# Altium PCB PCB_Version_1.PcbDoc
Units mm, origin at the board's own origin, x right, y up, seen from the top; angles counter-clockwise.
Board outline 89.92 x 99.82 mm, 2 copper layers (Top Layer, Bottom Layer); 44 components, 34 nets, 150 pads, 6 vias.
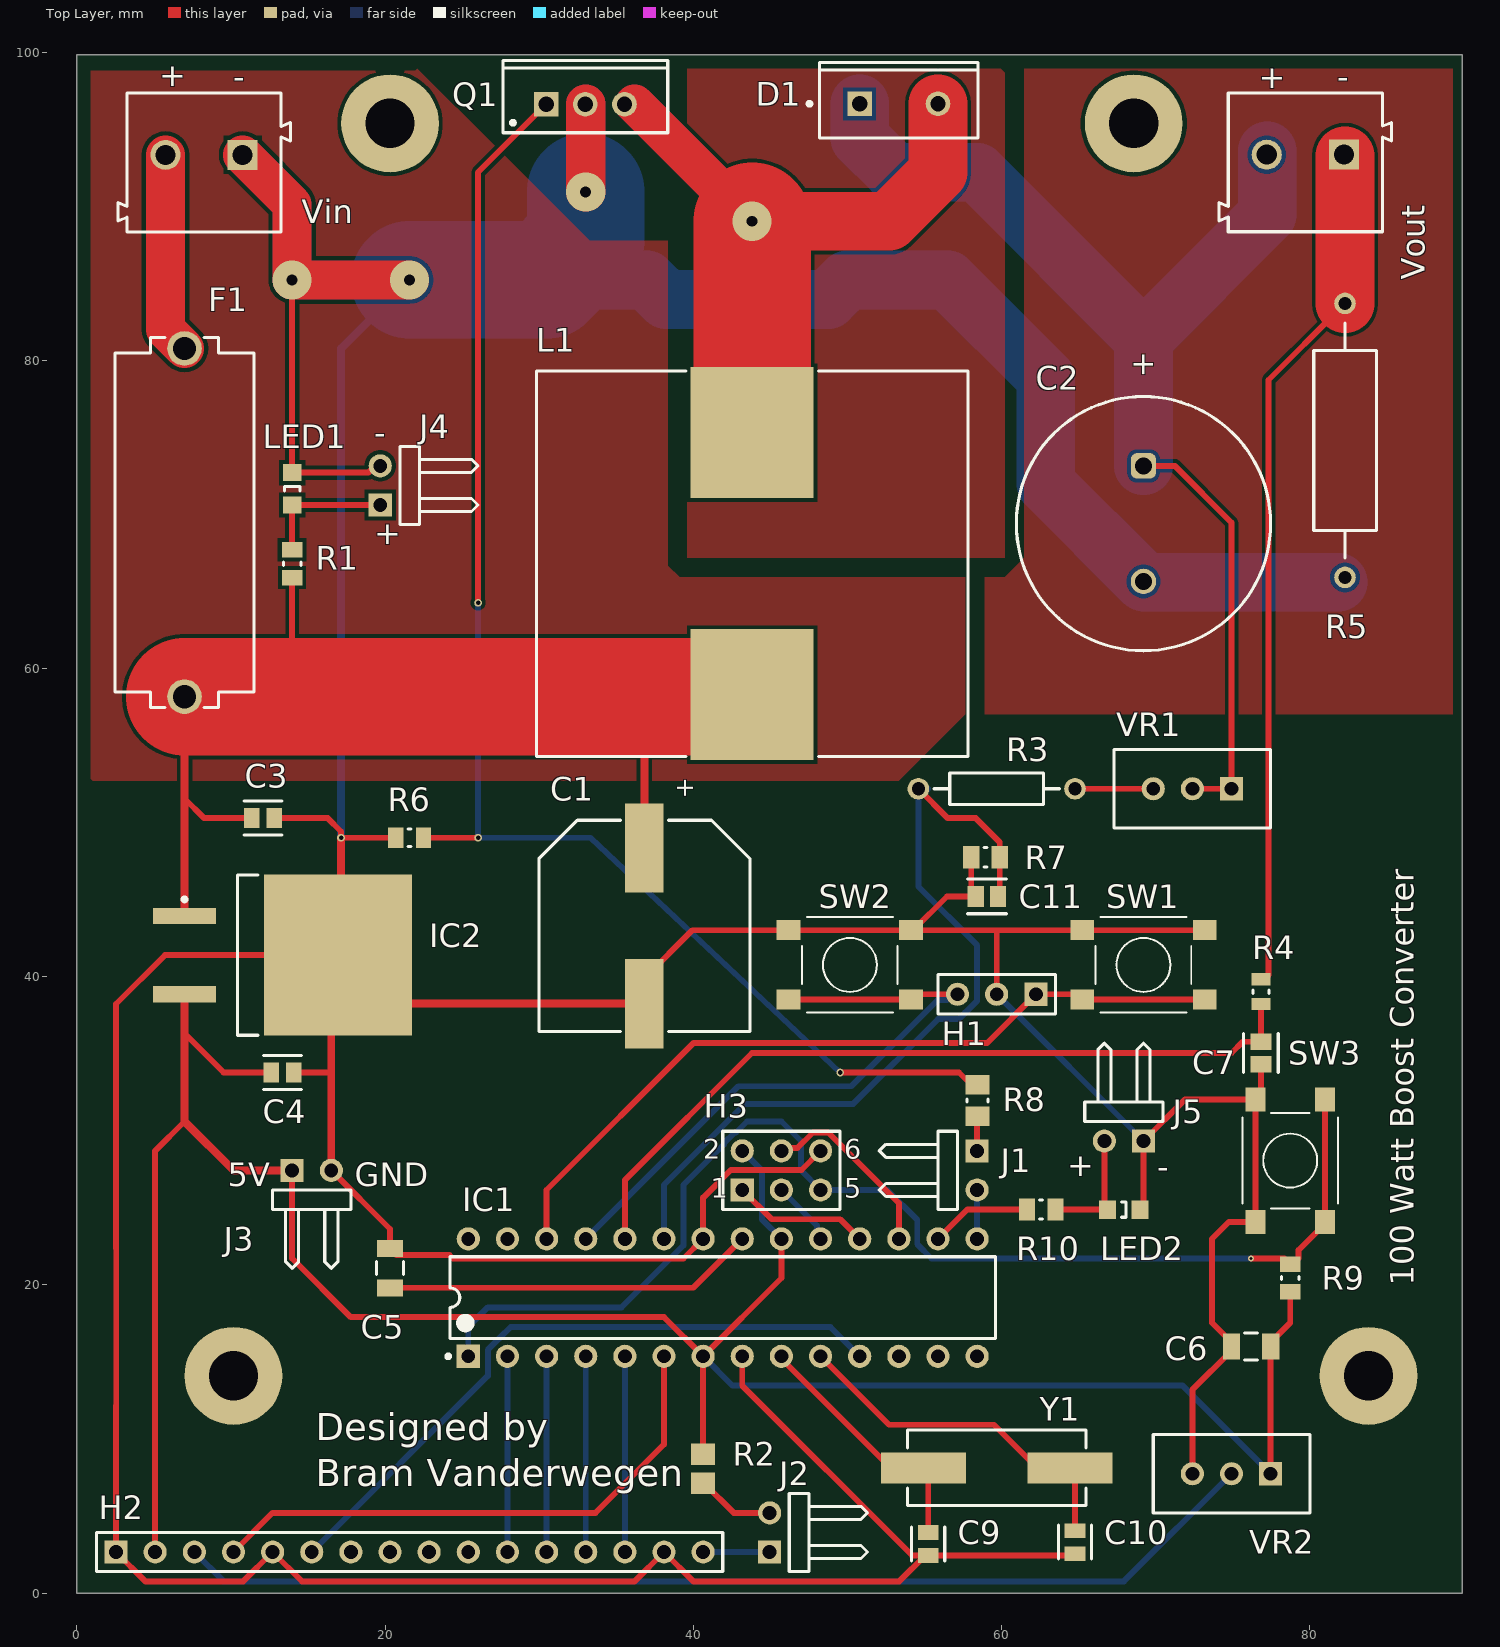
[diagram p0: Top Layer view]
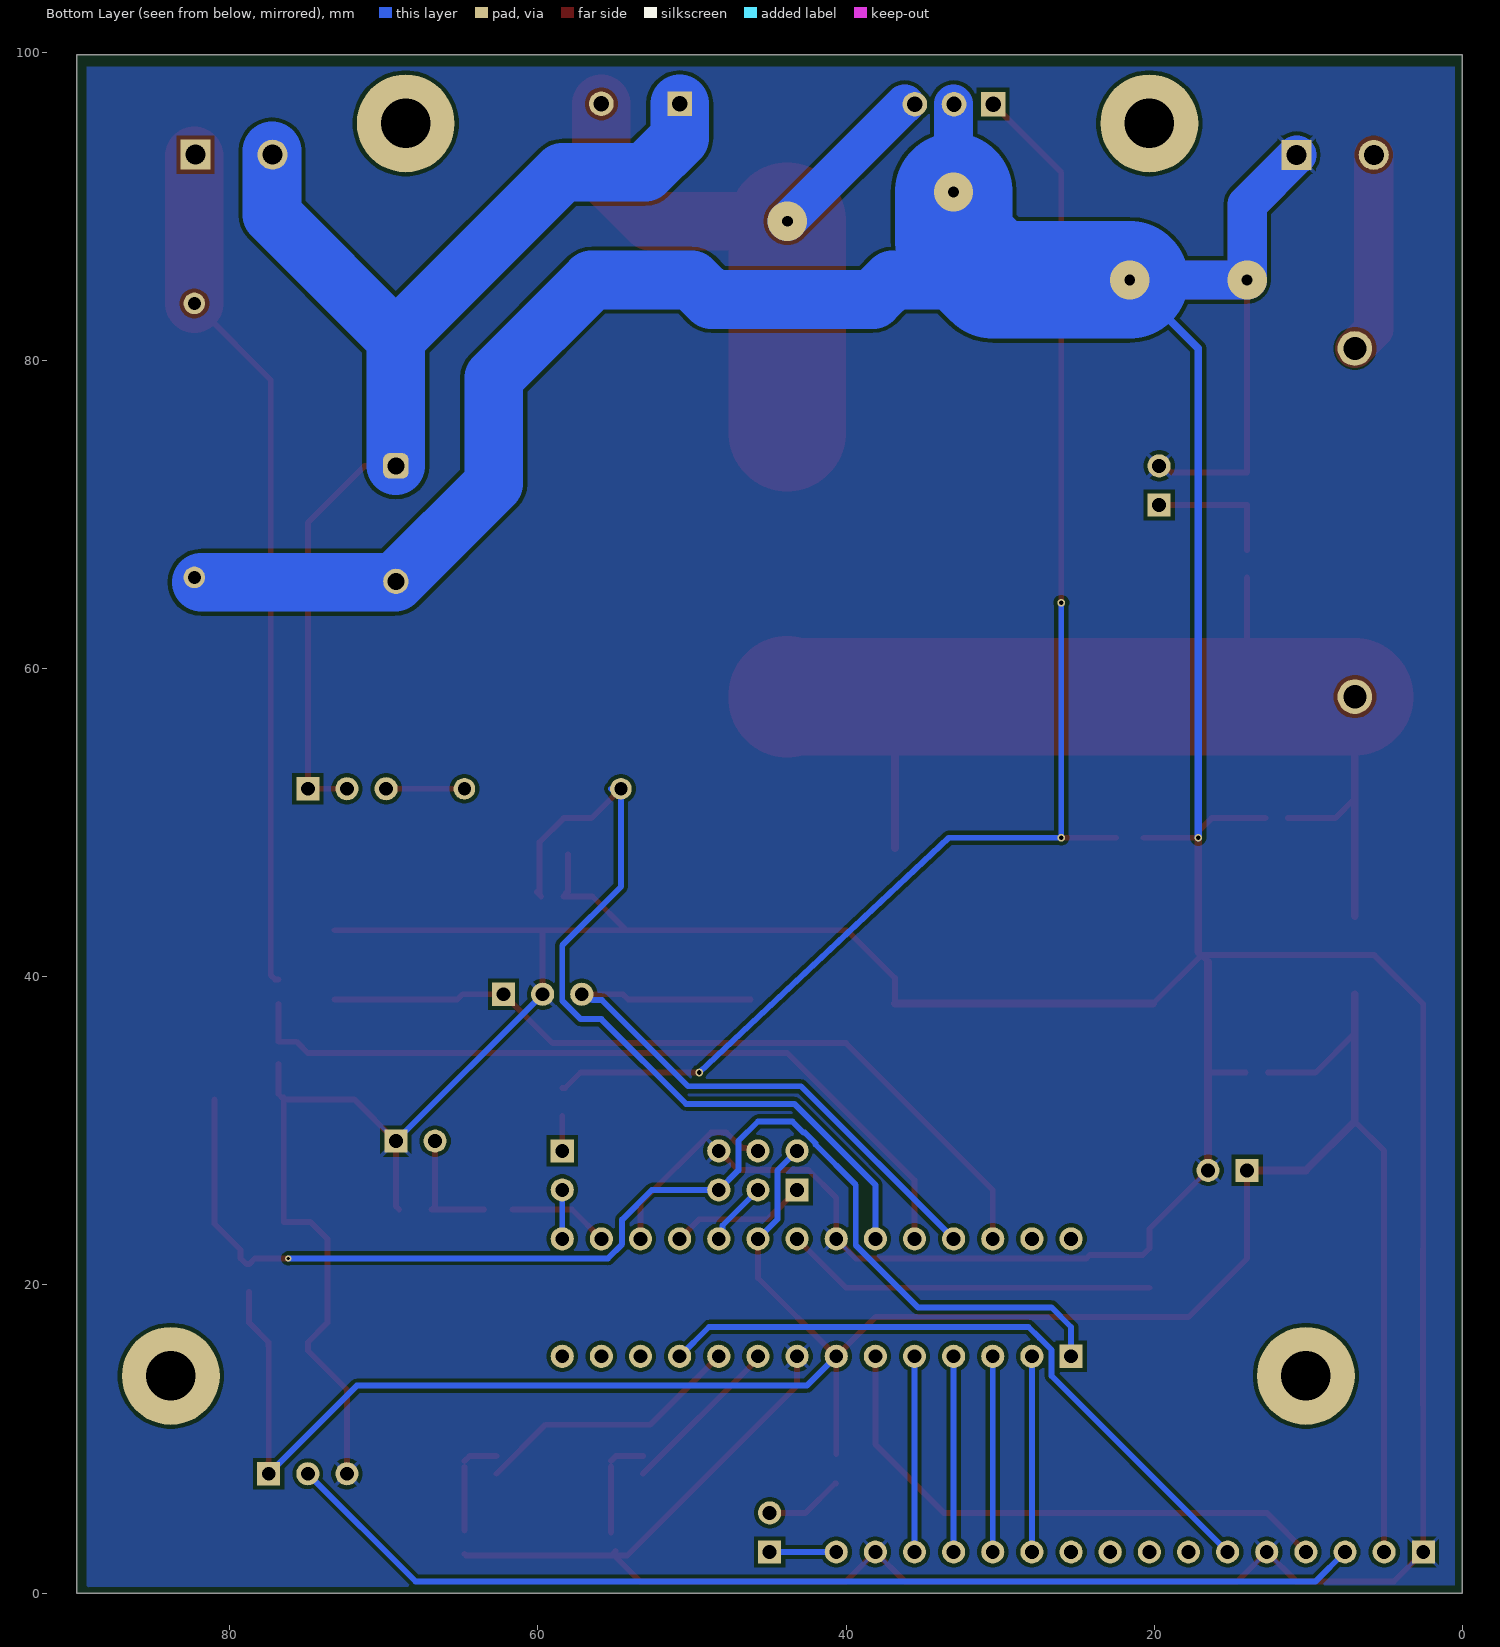
[diagram p1: Bottom Layer view, seen from below]
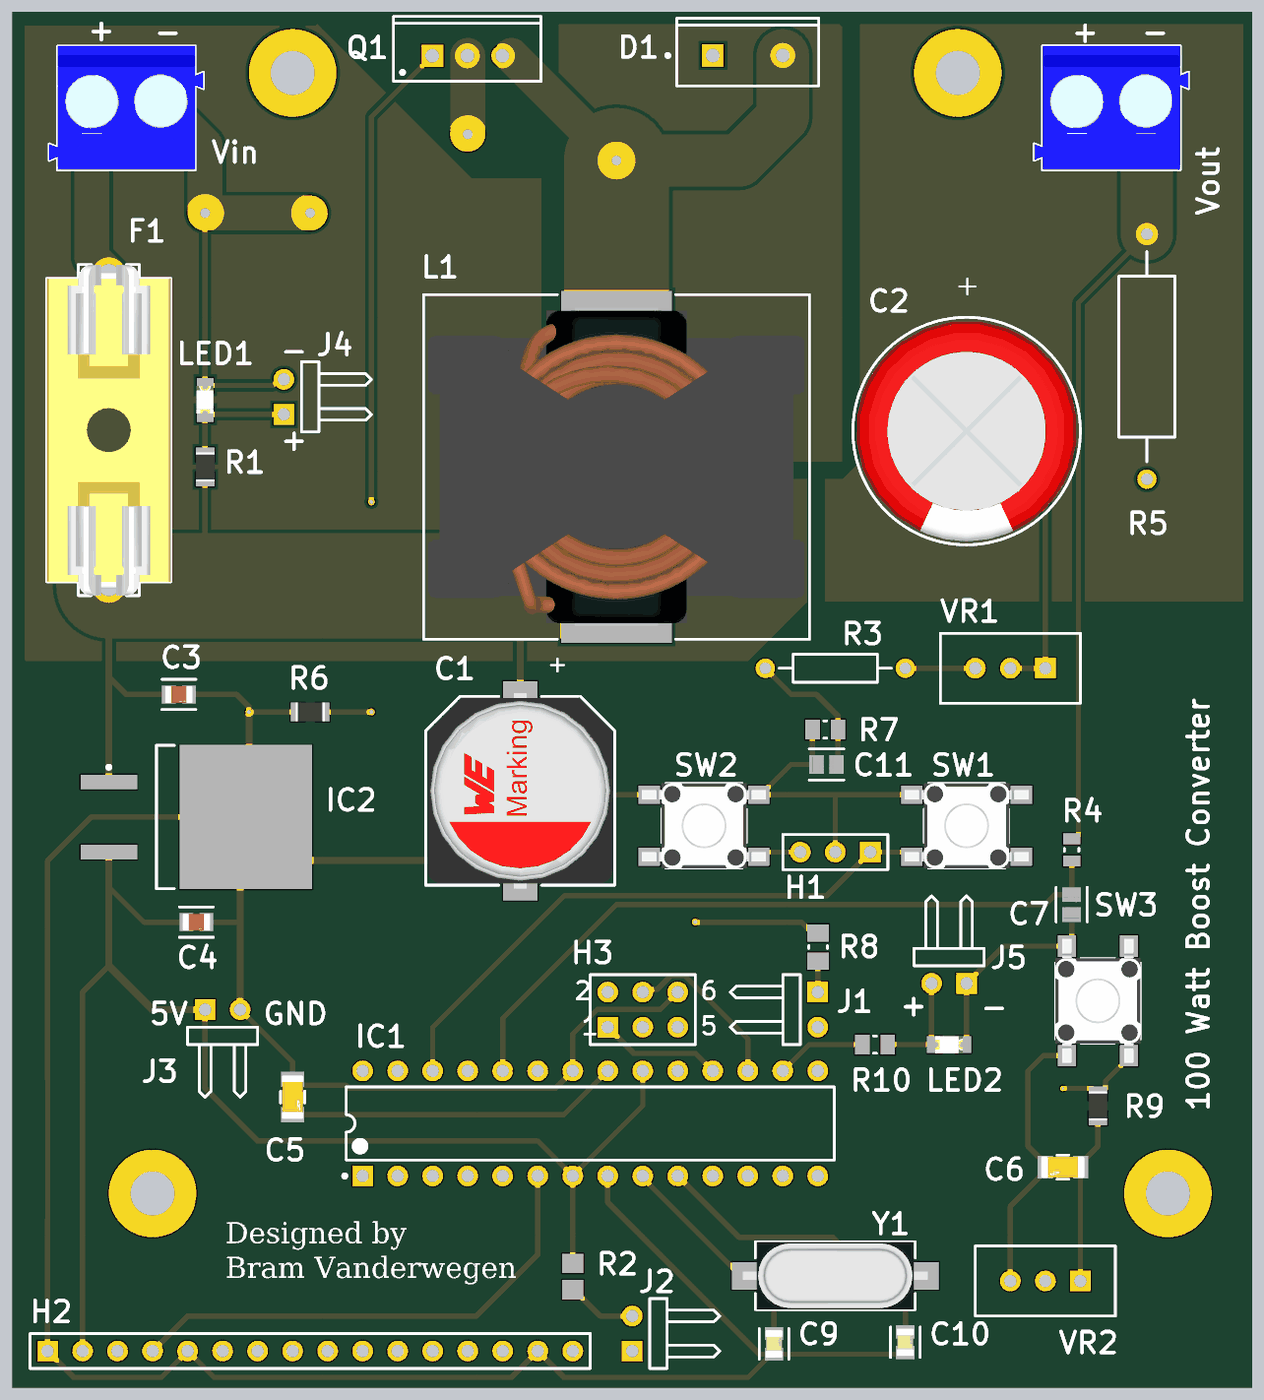
[diagram p2: 3D render of the assembled board from above, using the file's embedded part models]

## Layer stack, top to bottom
Top Solder: solder mask 0.0102, Solder Resist, Dk 3.5
Top Layer: signal copper 0.0356
Dielectric 1: dielectric 0.32, FR-4, Dk 4.8
Bottom Layer: signal copper 0.0356
Bottom Solder: solder mask 0.0102, Solder Resist, Dk 3.5

## Board outline
0,99.822 89.916,99.822 89.916,0 0,0

## Design rules (kind name [scope] priority, off if disabled: settings)
Clearance [All] p1: gap=0.254 ignorepadtopadclearanceinfootprint=FALSE except(0: Arc-Hole Track-Hole SMDPad-Hole THPad-Hole Via-Hole Fill-Hole Poly-Hole Region-Hole Text-Hole)
Height [All] p1: minheight=0 maxheight=254 prefheight=12.7
HoleSize [All] p1: absolutevalues=TRUE maxlimit=5 minlimit=0.025 maxpercent=80.000 minpercent=20.000
PolygonConnect [All] p1: connectstyle=Relief reliefconductorwidth=0.254 reliefentries=4 polygonreliefangle="45 Angle" airgapwidth=0.254
RoomDefinition Boost_Converter_1 [InComponentClass('Boost_Converter_1')] p1: confinementstyle=ConfineIn formatcopy=TRUE lockcomponents=FALSE outline 152.817,5.626 463.84,5.626 463.84,49.314 152.817,49.314
RoutingVias [All] p1: holewidth=0.711 width=1.27 viastyle="Through Hole" minholewidth=0.2 minwidth=0.4 maxholewidth=5 maxwidth=10
ShortCircuit [All] p1: allowed=TRUE
SolderMaskExpansion [All] p1: expansion=0.102 istentingtop=FALSE
Width Width_2 [Not All] p1: maxlimit=7.62 minlimit=0.381 preferedwidth=0.381 minimp=50.000000 maximp=50.000000 favimp=50.000000
Width Width_1 [Not All] p2: maxlimit=0.254 minlimit=0.254 preferedwidth=0.254
Width [All] p3: maxlimit=7.62 minlimit=0.381 preferedwidth=0.381 minimp=50.000000 maximp=50.000000 favimp=50.000000
27 further rules are at their usual default settings.

## Components (designator, comment, footprint, x,y, rotation, side; value= is the part's Value field where it differs from the comment)
C1 "1000uF, 25V" WCAP-ASLI_D12.5H14 36.83,43.307 r90 top
C2 "1000uF, 63V" WCAP-ATG5_D16H31.5 69.215,69.402 r90 top
C3 "100nF 50V" FP-GCD21B-0_15-IPC_C 12.065,50.292 r0 top
C4 "100nF 50V" FP-GCD21B-0_15-IPC_C 13.335,33.782 r0 top
C5 "100nF 50V" FP-CL31-IPC_C 20.32,21.088 r270 top
C6 "100nF 50V" FP-CL31-IPC_C 76.2,16.002 r180 top
C7 "10nF 50V" FP-CL21-IPC_C 76.835,35.052 r270 top
C9 "22pF" FP-C0805C-DN-MFG 55.245,3.187 r270 top value="22 pF"
C10 "22pF" FP-C0805C-DN-MFG 64.77,3.302 r270 top value="22 pF"
C11 "10nF 50V" FP-CL21-IPC_C 59.055,45.212 r180 top
D1 "MBR10100G" ONSC-TO-220-2-221B-04_E 53.34,96.647 r90 top
F1 "696101000002" 696101000002 6.985,69.472 r270 top
H1 "Header 3" HDR1X3 62.23,38.862 r180 top
H2 "Header 16" HDR1X16 2.54,2.667 r0 top
H3 "Header 3X2" HDR2X3 43.18,26.162 r0 top
IC1 "ATmega8-16PU" 28P3 41.91,19.177 r90 top
IC2 "L7805CD2T-TR" TO-263_M 13.335,41.402 r0 top
J1 "Jumper" HDR1X2H 58.42,28.702 r270 top
J2 "Jumper" HDR1X2H 44.958,2.667 r90 top
J3 "Jumper" HDR1X2H 13.97,27.432 r0 top
J4 "Jumper" HDR1X2H 19.685,70.612 r90 top
J5 "Jumper" HDR1X2H 69.215,29.337 r180 top
L1 "100uH, 11.2A" WE-HCF_2920 43.815,66.802 r0 top
LED1 "Green" 0805_A 13.97,71.662 r270 top
LED2 "Super Red" 0805_A 67.945,24.892 r180 top
Q1 "IRL540NPbF" TO-220AB 32.995,96.622 r0 top
R1 "10kΩ" RESC2013X60X35NL10T20 13.97,66.802 r270 top
R2 "4.7kOhm" RESC2013X60X40ML20T25 40.64,8.067 r90 top
R3 "43K Ohm" AXIAL-0.4 59.69,52.197 r180 top value=43K
R4 "1.5k" RESC2013X60X35LL10T20 76.835,39.027 r270 top
R5 "0.22Ω 5W" AXIAL-0.7 82.296,74.803 r90 top value=0.22Ω
R6 "10k" RESC2013X60X35NL10T20 21.59,49.022 r0 top
R7 "2.7k" RESC2013X50X30NL20T20 58.964,47.752 r0 top
R8 "RK73B2ATTD100J" RESC2013X60X30ML20T20 58.445,31.97 r270 top
R9 "10 kOhm" RESC2013X60X35NL10T20 78.74,20.447 r270 top
R10 "2.7k" RESC2013X50X30NL20T20 62.575,24.892 r180 top
SW1 "430182070816" 430182070816 69.215,40.767 r0 top
SW2 "430182070816" 430182070816 50.165,40.767 r0 top
SW3 "430182070816" 430182070816 78.74,28.067 r270 top
Vin "691101710002" 691101710002 8.255,92.837 r180 top
Vout "691101710002" 691101710002 79.716,92.845 r180 top
VR1 "10kΩ" 10k_trimmer 72.39,52.197 r180 top
VR2 "10kΩ" 10k_trimmer 74.93,7.747 r180 top
Y1 "16MHz" WE-XTAL_HC49/4HSMX 59.69,8.128 r0 top

## Footprints (in the part's own frame and the unit in brackets; to place one, negate y for a bottom-side part, rotate by r counter-clockwise, add the part's x,y. Pads: shape width x height; smd on the part's side, far side on the other; paste and mask are expansions set on the pad)
10k_trimmer [mm]
  rect 1.5x1.5 hole 0.9: 1(-2.54,0)
  round 1.5 hole 0.9: 2(0,0) 3(2.54,0)
  silkscreen extent -5.08,-2.54 5.08,2.54
28P3 [mm] "28-Pin Plastic Dual In-Line Package (PDIP)"
  rect 1.5x1.5 hole 0.9: 1(-3.81,16.51)
  round 1.5 hole 0.9: 2(-3.81,13.97) 3(-3.81,11.43) 4(-3.81,8.89) 5(-3.81,6.35) 6(-3.81,3.81) 7(-3.81,1.27) 8(-3.81,-1.27) 9(-3.81,-3.81) 10(-3.81,-6.35) 11(-3.81,-8.89) 12(-3.81,-11.43) 13(-3.81,-13.97) 14(-3.81,-16.51) 15(3.81,-16.51) 16(3.81,-13.97) 17(3.81,-11.43) 18(3.81,-8.89) 19(3.81,-6.35) 20(3.81,-3.81) 21(3.81,-1.27) 22(3.81,1.27) 23(3.81,3.81) 24(3.81,6.35) 25(3.81,8.89) 26(3.81,11.43) 27(3.81,13.97) 28(3.81,16.51)
  silkscreen extent -3.93,-17.7 2.65,17.93, body extent -3.6,-17.65 3.6,17.65, height 4.58
0805_A [mm] "Chip LED, 2-Leads, Body 2.0x1.3mm, IPC Medium Density"
  rect 1.1x1.2 smd: 1(-1.05,0) 2(1.05,0)
  silkscreen extent -0.15,-0.5 0.15,0.5, body extent -1,-0.62 1,0.63, height 0.68
430182070816 [mm] "6*6mm vertical type, SMD, height 7.0mm, black actuator, 160gf, T&R"
  rect 1.55x1.3 smd: 1(-3.975,2.25) 2(-3.975,-2.25) 3(3.975,2.25) 4(3.975,-2.25)
  silkscreen extent -3.1,-3.1 3.1,3.1, body extent -4.5,-3.1 4.5,3.1, height 6.99
691101710002 [mm] "5,00mm - modular - blue - Horizontal entry with pressure clamp - 12,6mm height - 02p"
  rect 1.95x1.95 hole 1.3: 1(-2.5,-0.5)
  round 1.95 hole 1.3: 2(2.5,-0.5)
  silkscreen extent -5.6,-4.5 5.6,4.5, body extent -5.6,-4.5 5.6,4.5, height 12.65
696101000002 [mm] "FUSEHOLDER BLOCKS - PCB - CLIP COVER - THT"
  round 2.25 hole 1.5: 1(-11.3,0) 2(11.3,0)
  silkscreen extent -12,-4.5 12,4.5, body extent -12,-4.5 12,4.5, height 13.55
AXIAL-0.4 [mm] "Axial Device, Thru-Hole; 2 Leads; 0.4 in Pin Spacing"
  round 1.4 hole 0.85: 1(-5.08,0) 2(5.08,0)
  silkscreen extent -4.06,-1.02 4.06,1.02
AXIAL-0.7 [mm] "Axial Device, Thru-Hole; 2 Leads; 0.7 in Pin Spacing"
  round 1.4 hole 0.85: 1(-8.89,0) 2(8.89,0)
  silkscreen extent -7.62,-2.03 7.62,2.03
FP-C0805C-DN-MFG [mm]
  rect 0.95x1.35 smd paste+0 mask+0: 1(-0.75,0) 2(0.75,0)
  silkscreen extent -1.1,-1.07 1.1,1.07, body extent -1.4,-0.85 1.4,0.85, height 0.25
FP-CL21-IPC_C [mm]
  rect 1.055x1.356 smd paste+0 mask+0: 1(-0.726,0) 2(0.726,0)
  silkscreen extent -1.25,-1.13 1.25,1.13, body extent -1.35,-0.82 1.35,0.82, height 0.25
FP-CL31-IPC_C [mm]
  rect 1.105x1.658 smd paste+0 mask+0: 1(-1.276,0) 2(1.276,0)
  silkscreen extent -0.42,-0.87 0.42,0.87, body extent -1.93,-0.97 1.93,0.97, height 0.25
FP-GCD21B-0_15-IPC_C [mm]
  rect 1.006x1.308 smd paste+0 mask+0: 1(-0.726,0) 2(0.726,0)
  silkscreen extent -1.23,-1.1 1.23,1.1, body extent -1.33,-0.8 1.33,0.8, height 0.25
HDR1X2H [mm] "Connector; Header; 2 Position; Right Angle"
  rect 1.5x1.5 hole 0.9: 1(0,0)
  round 1.5 hole 0.9: 2(2.54,0)
  silkscreen extent -1.27,-6.35 3.81,-1.27
HDR1X3 [mm] "Connector; Header; 3 Position"
  rect 1.5x1.5 hole 0.9: 1(0,0)
  round 1.5 hole 0.9: 2(2.54,0) 3(5.08,0)
  silkscreen extent -1.27,-1.27 6.35,1.27
HDR1X16 [mm] "Connector; Header; 16 Position"
  rect 1.5x1.5 hole 0.9: 1(0,0)
  round 1.5 hole 0.9: 2(2.54,0) 3(5.08,0) 4(7.62,0) 5(10.16,0) 6(12.7,0) 7(15.24,0) 8(17.78,0) 9(20.32,0) 10(22.86,0) 11(25.4,0) 12(27.94,0) 13(30.48,0) 14(33.02,0) 15(35.56,0) 16(38.1,0)
  silkscreen extent -1.27,-1.27 39.37,1.27
HDR2X3 [mm] "Connector; Header; 3x2 Position"
  rect 1.5x1.5 hole 0.9: 1(0,0)
  round 1.5 hole 0.9: 2(0,2.54) 3(2.54,0) 4(2.54,2.54) 5(5.08,0) 6(5.08,2.54)
  silkscreen extent -1.27,-1.27 6.35,3.81
ONSC-TO-220-2-221B-04_E [mm] "FM, 2-Leads, Body 10.3x4.85mm, Pitch 5.08mm"
  rect 1.6x1.6 hole 1: 1(0,2.54)
  round 1.6 hole 1: 3(0,-2.54)
  silkscreen extent -2.2,-5.15 2.69,5.92, body extent -2.18,-5.15 2.67,5.15, height 19.05
RESC2013X50X30NL20T20 [mm] "Chip Resistor, 2-Leads, Body 2.00x1.25mm, IPC Medium Density"
  rect 1.05x1.45 smd: 1(-0.925,0) 2(0.925,0)
  silkscreen extent -0.1,-0.62 0.1,0.62, body extent -1.1,-0.72 1.1,0.72, height 0.5
RESC2013X60X30ML20T20 [mm] "Chip Resistor, 2-Leads, Body 2.00x1.25mm, IPC Low Density"
  rect 1.25x1.55 smd: 1(-1.025,0) 2(1.025,0)
  silkscreen extent -0.1,-0.67 0.1,0.67, body extent -1.1,-0.72 1.1,0.72, height 0.6
RESC2013X60X35LL10T20 [mm] "Chip Resistor, 2-Leads, Body 2.00x1.25mm, IPC High Density"
  rect 0.8x1.25 smd: 1(-0.8,0) 2(0.8,0)
  silkscreen extent -0.1,-0.53 0.1,0.53, body extent -1.05,-0.67 1.05,0.67, height 0.6
RESC2013X60X35NL10T20 [mm] "Chip Resistor, 2-Leads, Body 2.1x1.35mm, IPC Medium Density"
  rect 1x1.35 smd: 1(-0.9,0) 2(0.9,0)
  silkscreen extent -0.1,-0.58 0.1,0.58, body extent -1.05,-0.68 1.05,0.67, height 0.6
RESC2013X60X40ML20T25 [mm] "Chip Resistor, 2-Leads, Body 2.00x1.25mm, IPC Low Density"
  rect 1.4x1.55 smd: 1(-0.95,0) 2(0.95,0)
  body extent -1.1,-0.72 1.1,0.72, height 0.6
TO-220AB [mm] "TO, Thru-Hole, Vertical, Heatsink Mounted; 3 In-Line Leads; Pitch 2.54 mm"
  rect 1.6x1.6 hole 1: 1(-2.54,0)
  round 1.6 hole 1: 2(0,0) 3(2.54,0)
  silkscreen extent -5.35,-1.85 5.35,2.85, body extent -5.4,-1.9 5.4,2.9, height 19.3
TO-263_M [mm] "D2-PAK, 4-Leads, Body 9.2x10.2mm, Pitch 2.54mm, Lead Span 15.4mm, IPC Low Density"
  rect 4.1x1.05 smd: 1(-6.35,2.54) 3(-6.35,-2.54)
  rect 9.6x10.45 smd: 4(3.6,0)
  silkscreen extent -6.47,-5.2 -1.6,5.2, body extent -2.9,-5.2 6.45,5.2, height 4.6
WCAP-ASLI_D12.5H14 [mm] "Aluminium Electrolytic V-Chip SMT Capacitors, 12.5x14mm"
  rect 5.8x2.5 smd: 1(5.05,0) 2(-5.05,0)
  silkscreen extent -6.85,-6.85 6.85,6.85, body extent -7.1,-6.72 7.1,6.73, height 14
WCAP-ATG5_D16H31.5 [mm] "Aluminum Electrolytic Capacitors, 16x31.5mm"
  rrect50% 1.65x1.65 hole 1.1: 1(3.75,0)
  round 1.65 hole 1.1: 2(-3.75,0)
  silkscreen extent -8.25,-8.25 8.25,8.25, body extent -7.99,-8 8,8, height 31.81
WE-HCF_2920 [mm] "SMD High Current Inductor, body 28x25mm"
  rect 8x8.5 smd: 1(0,8.5) 2(0,-8.5)
  silkscreen extent -14,-12.5 14,12.5, body extent -13.65,-11.55 13.65,11.55, height 20
WE-XTAL_HC49/4HSMX [mm] "Quartz Crystal, size HC49/4HSMX, body 11.4x4.9mm"
  rect 5.5x2 smd: 1(-4.75,0) 2(4.75,0)
  silkscreen extent -5.8,-2.45 5.8,2.45, body extent -6.7,-2.45 6.7,2.45, height 4.3

## Part data
C1: library part 865080462016, "WCAP-ASLI Aluminum Electrolytic Capacitor, V-Chip, SMT, D12.5xH14mm, 1000uF, 25V", Capacitance=1000uF, Capacitance Tolerance=+/-20%, Leakage Current=250uA, Manufacturer="Wurth Elektronik", Operating Temperature="-55 to +105degC", Rated Voltage=25VDC, Ripple Current=1100mA, Supplier Part Number 1=732-8444-1-ND, ComponentLink1Description=Manufacturer, ComponentLink1URL=http://www.we-online.de, ComponentLink2Description=Datasheet, ComponentLink2URL=https://www.we-online.com/catalog/datasheet/865080462016.pdf, Diameter=12.5mm, Dissipation Factor=14%, Endurance=2000h, Height=14mm, Manufacturer Part Number=865080462016, Mounting Technology=SMT, Packaging="Tape and Reel", Published Date="October 2020", Supplier 1=Digi-Key, Technical Reference=ASEH140102M025DVCTGB000
C2: library part 860020780025, "CAP ALUM 1000UF 20% 63V RADIAL", Capacitance=1000uF, Capacitance Tolerance=+/-20%, Case/Package=Radial, Leakage Current=630uA, Manufacturer="Wurth Elektronik", Max Operating Temperature=105°C, Min Operating Temperature=-40°C, Operating Temperature="-40 to +105degC", Package Quantity=250, Rated Voltage=63VDC, Ripple Current=1185mA, Supplier Part Number 1=732-8986-1-ND, Tolerance=20%, Voltage Rating=63V, Category="Aluminum Electrolytic Capacitors", ComponentLink1Description=Manufacturer, ComponentLink1URL=http://www.we-online.de, ComponentLink2Description=Datasheet, ComponentLink2URL=https://www.we-online.com/catalog/datasheet/860020780025.pdf, ComponentLink3Description=http://www.farnell.com/datasheets/1879699.pdf?src-supplier=Farnell, ComponentLink3URL=http://www.farnell.com/datasheets/1879699.pdf?src-supplier=Farnell, ComponentLink4Description=https://katalog.we-online.de/pbs/datasheet/860020780025.pdf?src-supplier=Digi-Key, ComponentLink4URL=https://katalog.we-online.de/pbs/datasheet/860020780025.pdf?src-supplier=Digi-Key, ComponentLink5Description=http://www.farnell.com/datasheets/1879699.pdf?src-supplier=Element14, ComponentLink5URL=http://www.farnell.com/datasheets/1879699.pdf?src-supplier=Element14, ComponentLink6Description=http://katalog.we-online.de/pbs/datasheet/860020780025.pdf?src-supplier=Digi-Key, ComponentLink6URL=http://katalog.we-online.de/pbs/datasheet/860020780025.pdf?src-supplier=Digi-Key, Diameter=16mm, Dissipation Factor=9%, Endurance=2000h, Height=31.5mm, Height - Seated (Max)=1.299inch, Lead Pitch=0.295inch, Life (Hours)=2000Hour, Manufacturer Part Number=860020780025, Mount="Through Hole", Mounting Technology=THT, Packaging="Ammo Pack", Polarity=Polar, Pricing 1="1=2,37000, 50=2,01700, 100=1,75700 (USD)", Published Date="October 2020", REACH SVHC=Unknown, RoHS=Yes, RoHS Compliant=Yes, Stock 1=70, Supplier 1=Digi-Key, Technical Reference=ATDK315102M063DSPADB000, Voltage Rating (DC)=63V
C3 C4: library part CMP-06035-045527-1, "Chip Multilayer Ceramic Capacitors for Automotive, 0805, 0.10uF, X7R, 15%, 10%, 50V, Grade 1", Capacitance=100nF, Case Code (Imperial)=0805, Case Code (Metric)=2012, Dielectric=X7R, Max Operating Temperature=125°C, Min Operating Temperature=-55°C, Package Quantity=3000, Ratings=AEC-Q200, Tolerance=10%, Voltage Rating=50V, Case/Package=0805, Depth=1.25mm, Height=1.25mm, Length=2mm, Mount="Surface Mount", Packaging="Tape and Reel", Termination=SMD/SMT, Thickness=0.049inch, Voltage Rating (DC)=50V, Weight=0.000335oz, Width=0.049inch
C5 C6: library part CMP-13271-001731-1, "Cap Ceramic 100nF 50V X7R ±10% SMD 1206 +125°C Embossed T/R", Capacitance=100nF, Case/Package=1206, Dielectric=X7R, Max Operating Temperature=125°C, Min Operating Temperature=-55°C, Package Quantity=15000, Tolerance=10%, Voltage=50V, Depth=1.6mm, Height=0.85mm, Lead Free="Lead Free", Length=3.2mm, Mount="Surface Mount", Packaging="Tape and Reel", Radiation Hardening=No, Thickness=0.037inch, Voltage Rating=50V, Voltage Rating (DC)=50V, Width=0.063inch
C7 C11: library part CMP-13271-002413-1, "CL21 Series 0805 10nF 50V ±10% Tolerance X7R Multilayer Ceramic Chip Capacitor", Capacitance=10nF, Case Code (Imperial)=0805, Case Code (Metric)=2012, Dielectric=X7R, Max Operating Temperature=125°C, Min Operating Temperature=-55°C, Package Quantity=1, Tolerance=10%, Voltage Rating=50V, Case/Package=0805, Contact Plating=Tin, Depth=1.25mm, Height=0.65mm, Lead Free="Lead Free", Length=0.079inch, Mount="Surface Mount", Packaging="Tape and Reel", Radiation Hardening=No, Thickness=0.03inch, Width=0.049inch
C9 C10: library part CMP-03020-018552-1, "CAP CER 22PF 50V C0G/NP0 0805", Capacitance="22 pF", Manufacturer=KEMET, Manufacturer Part Number=C0805C220J5GAC7210, Package=C0805C-DN, Temperature="-55°C to +125°C", Temperature Characteristic=C0G, Temperature Coefficient=30ppm/°C, Temperature Range High=+125°C, Temperature Range Low=-55°C, Tolerance=0.05, Voltage Rating="50 V", Automotive=No, Category=Cap, ComponentLink2Description=Datasheet, ComponentLink2URL=https://content.kemet.com/datasheets/KEM_C1003_C0G_SMD.pdf, Device Class L1="Passive Components", Device Class L2=Capacitors, Device Class L3="Ceramic Capacitors", Digikey Description="CAP CER 22PF 50V C0G/NP0 0805", Height=0.88mm, Ipc Land Pattern Name=CAPC200125X78, Lead Free=Yes, Material=Ceramic, Octopart=https://octopart.com/c0805c220j5gac7210-kemet-3882539, RoHS=TRUE
D1: library part CMP-1055-00601-1, "SWITCHMODE(TM) Power Rectifier, 2-Pin TO-220, Pb-Free, Tube", Manufacturer="On Semiconductor", ComponentLink1Description="Manufacturer URL", ComponentLink1URL=http://www.onsemi.com/, ComponentLink2Description=Datasheet, ComponentLink2URL=http://www.onsemi.cn/pub_link/Collateral/MBR1080-D.PDF, ComponentLink3Description="Package Specification", ComponentLink3URL=http://www.onsemi.com/pub_link/Collateral/BYW29-D.PDF, Configuration=Single, DatasheetVersion="Rev. 1", IFSM Max (A)=150, Mounting Technology="Through Hole", PackageDescription="2-Pin Flange Mount, Vertical Straight Lead, Body 9.97 x 4.44 mm, Pitch 5.08 mm", PackageReference=TO-220-2-221B-04_E, PackageVersion="Rev. E", Packing=Tube, PartNumber=MBR10100G, RoHS=TRUE
F1: "WR-FSH Fuse Holder Blocks Fuse Holder Blocks Clip Cover for PCB", Operating Temperature="-30 to 120 degC", ComponentLink1Description=Manufacturer, ComponentLink1URL=http://www.we-online.de, ComponentLink2Description=Datasheet, ComponentLink2URL=https://katalog.we-online.de/em/datasheet/696101000002.pdf, Fuse Size="5x20 mm", Mounting Technology=THT, Packaging=Box, Part Number=696101000002, Published Date="August 2018", Publisher="Wurth Elektronik"
H1: "Header, 3-Pin", LatestRevisionDate=17-Jul-2002, LatestRevisionNote="Re-released for DXP Platform.", Publisher="Altium Limited"
H2: "Header, 16-Pin", LatestRevisionDate=17-Jul-2002, LatestRevisionNote="Re-released for DXP Platform.", Publisher="Altium Limited"
H3: "Header, 3-Pin, Dual row", LatestRevisionDate=17-Jul-2002, LatestRevisionNote="Re-released for DXP Platform.", Publisher="Altium Limited"
IC1: library part CMP-0095-00372-1, "8-bit AVR Microcontroller, 4.5-5.5V, 16MHz, 8KB Flash, 512 Bytes EEPROM, 1KB SRAM, 28-pin PDIP, Industrial Grade (-40°C to 85°C)", ComponentLink1Description="Manufacturer URL", ComponentLink1URL=http://www.atmel.com/, ComponentLink2Description=ATmega8(L), ComponentLink2URL=http://www.atmel.com/dyn/resources/prod_documents/doc2486.pdf, ComponentLink3Description="ATmega8(L) Summary", ComponentLink3URL=http://www.atmel.com/dyn/resources/prod_documents/2486S.pdf, DatasheetVersion="revZ, Feb-2011", PackageDescription="28-lead (0.300\"/7.62mm Wide) Plastic Dual Inline Package (PDIP)", PackageReference=28P3, PackageVersion="revB, Sep-2001"
IC2: library part CMP-0244-00213-1, "Positive Voltage Regulator, 3-Pin D2PAK, Tape and Reel", ComponentLink1Description="Manufacturer URL", ComponentLink1URL=http://www.st.com, ComponentLink2Description=Datasheet, ComponentLink2URL=http://www.st.com/internet/com/TECHNICAL_RESOURCES/TECHNICAL_LITERATURE/DATASHEET/CD00000444.pdf, DatasheetVersion=16/11/2011, PackageDescription="3-Pin Transistor Outline Package 2.54 mm Pitch, 15.4 mm Lead Span (D2PAK)", PackageReference=TO-263, PackageVersion=2011
J1 J2 J3 J4 J5: library part "Header 2H", "Header, 2-Pin, Right Angle", LatestRevisionDate=17-Jul-2002, LatestRevisionNote="Re-released for DXP Platform.", Publisher="Altium Limited"
L1: library part 74437529203101, "WE-HCF SMT High Current Inductor, size 2920, 100uH, 11.2A, 25.19mOhm", DC Resistance max.=25.19mOhm, DC Resistance typ.=22.9mOhm, Inductance=100uH, Manufacturer="Wurth Elektronik", Operating Temperature="-40 to +125degC", Rated Current=11.2A, Saturation Current=9.4A, Self Resonant Frequency=4.3MHz, Supplier Part Number 1=732-11715-ND, ComponentLink1Description=Manufacturer, ComponentLink1URL=http://www.we-online.de, ComponentLink2Description=Datasheet, ComponentLink2URL=https://www.we-online.com/catalog/datasheet/74437529203101.pdf, Manufacturer Part Number=74437529203101, Mounting Technology=SMT, Packaging="Tray and Carton", Published Date="September 2020", Size=2920, Supplier 1=Digi-Key
LED1: library part CMP-1426-00007-1, "SMD mono-color Chip LED, WL-SMCW, Green", Manufacturer="Wuerth Elektronik", PartNumber=150080GS75000, Color=Green, ComponentLink1Description="Manufacturer URL", ComponentLink1URL=http://www.we-online.com, ComponentLink2Description=Datasheet, ComponentLink2URL=http://katalog.we-online.com/led/datasheet/150080GS75000.pdf, PackageReference=0805_A
LED2: library part CMP-1426-00010-1, "SMD mono-color Chip LED, WL-SMCW, Super Red", Manufacturer="Wuerth Elektronik", PartNumber=150080SS75000, Color="Super Red", ComponentLink1Description="Manufacturer URL", ComponentLink1URL=http://www.we-online.com, ComponentLink2Description=Datasheet, ComponentLink2URL=http://katalog.we-online.com/led/datasheet/150080SS75000.pdf, PackageReference=0805_A
Q1: library part NMOS-2, "Trans MOSFET N-CH 100V 36A 3-Pin(3+Tab) TO-220AB", Case/Package=TO-220AB, Continuous Drain Current (ID)=36A, Drain to Source Breakdown Voltage=100V, Drain to Source Resistance=63mR, Drain-source On Resistance-Max=53mR, Gate to Source Voltage (Vgs)=16V, Input Capacitance=1.8nF, Manufacturer="International Rectifier", Manufacturer Part Number=IRL540NPBF, Max Operating Temperature=175°C, Max Power Dissipation=140W, Min Operating Temperature=-55°C, Package Quantity=50, Supplier Part Number 1=IRL540NPBF-ND, Category=MOSFETs, ComponentLink1Description="Manufacturer Link", ComponentLink1URL=http://www.irf.com/, ComponentLink2Description=https://datasheet.ciiva.com/7835/irl540npbf-7835764.pdf?src-supplier=Element14, ComponentLink2URL=https://datasheet.ciiva.com/7835/irl540npbf-7835764.pdf?src-supplier=Element14, ComponentLink3Description=https://datasheet.ciiva.com/14170/kkirl540n-data-e-14170372.pdf?src-supplier=Distrelec, ComponentLink3URL=https://datasheet.ciiva.com/14170/kkirl540n-data-e-14170372.pdf?src-supplier=Distrelec, ComponentLink4Description=https://datasheet.ciiva.com/29326/162798-da-01-en-irf-540n-29326742.pdf?src-supplier=Conrad, ComponentLink4URL=https://datasheet.ciiva.com/29326/162798-da-01-en-irf-540n-29326742.pdf?src-supplier=Conrad, ComponentLink5Description=https://datasheet.ciiva.com/6368/irl540npbf-6368261.pdf?src-supplier=Digi-Key, ComponentLink5URL=https://datasheet.ciiva.com/6368/irl540npbf-6368261.pdf?src-supplier=Digi-Key, ComponentLink6Description=https://datasheet.ciiva.com/16395/irl540npbf-16395612.pdf?src-supplier=Future+Electronics, ComponentLink6URL=https://datasheet.ciiva.com/16395/irl540npbf-16395612.pdf?src-supplier=Future+Electronics, Current Rating=36A, DatasheetVersion=PD-9.814, Drain to Source Voltage (Vdss)=100V, Dual Supply Voltage=100V, Element Configuration=Single, Fall Time=62ns, Height=8.77mm, LatestRevisionDate=17-Jul-2002, LatestRevisionNote="Re-released for DXP Platform.", Lead Free="Lead Free", Lead Pitch=2.54mm, Length=10.54mm, Mount="Through Hole", Nominal Vgs=2V, Note="Pin 2 is electrically connected to pin 4.", Number of Elements=1, Number of Pins=3, On-State Resistance=53mR, PackageDescription="TO, Thru-Hole, Vertical, Heatsink Mounted; 3 In-Line Leads; Pitch 2.54 mm", PackageReference=TO-220AB, PackageVersion=Feb-1997, Packaging=Rail/Tube, Power Dissipation=140W, Pricing 1="1=1,24000, 10=1,01100, 25=0,99200, 100=0,78610, 500=0,66628, 1000=0,54276, 2500=0,51094, 5000=0,49342 (USD)", Published=8-Jun-2000, Publisher="Altium Limited", Rds On Max=44mR, REACH SVHC="No SVHC", Recovery Time=290ns, Rise Time=81ns, RoHS=Yes, RoHS Compliant=Yes, Series=HEXFET®, Stock 1=6708, Supplier 1=Digi-Key, Termination="Through Hole", Turn-Off Delay Time=39ns, Turn-On Delay Time=11ns, Voltage Rating (DC)=100V, Width=4.69mm
R1 R6 R9: library part CMP-1659-00013-4, "Chip Resistor, 10 KOhm, +/- 1%, 0.125 W, -55 to 155 degC, 0805 (2012 Metric), RoHS, Tape and Reel", Manufacturer=Yageo, Max Operating Temperature="155 degC", Min Operating Temperature="-55 degC", Package Quantity=5000, Voltage Rating="150 V", ComponentLink1Description="Manufacturer URL", ComponentLink1URL=http://www.yageo.com/, ComponentLink2Description=Datasheet, ComponentLink2URL=http://www.yageo.com/documents/recent/PYu-RC_Group_51_RoHS_L_04.pdf, DatasheetVersion="Rev. 4, 02/2016", Height="0.5 mm", Length="2 mm", Mount="Surface Mount", Mounting Technology="Surface Mount", PackageDescription="2-Pin Surface Mounted Device, Body 2 x 1.25 mm", PackageReference=0805, Packaging="Tape and Reel", Pins=2, REACH SVHC="No SVHC", RoHSCompliant=true
R2: library part CMP-2001-00644-1, Manufacturer=Panasonic, Part Number=ERA6AEB472V
R3: library part Res2, "Res Metal Film 43K Ohm 1% 0.6W ±50ppm/C Conformal Coated AXL Ammo", Case/Package=Conformal, Manufacturer=Yageo, Manufacturer Part Number=MF0207FTE52-43K, Max Operating Temperature=155°C, Min Operating Temperature=-55°C, Resistance=43kR, Resistor Type="Metal Film", Supplier Part Number 1=MF0207FTE52-43K-ND, Temperature Coefficient=50ppm/°C, Tolerance=1%, Category="Through-Hole Resistors", ComponentLink1Description=http://components.arrow.com/part/dataview/0323_02063068?src-supplier=Arrow+Europe, ComponentLink1URL=http://components.arrow.com/part/dataview/0323_02063068?src-supplier=Arrow+Europe, ComponentLink2Description=https://www.distrelec.biz/Web/Downloads/_t/ds/MFxx_eng_tds.pdf?mime=application%2Fpdf&src-supplier=Distrelec, ComponentLink2URL=https://www.distrelec.biz/Web/Downloads/_t/ds/MFxx_eng_tds.pdf?mime=application%2Fpdf&src-supplier=Distrelec, ComponentLink3Description=http://www.yageo.com/documents/recent/Leaded-R_MF0_2011.pdf?src-supplier=Avnet+Europe, ComponentLink3URL=http://www.yageo.com/documents/recent/Leaded-R_MF0_2011.pdf?src-supplier=Avnet+Europe, ComponentLink4Description=http://www.yageo.com/documents/recent/Yageo%20LR_MF0_2013.pdf?src-supplier=Avnet, ComponentLink4URL=http://www.yageo.com/documents/recent/Yageo%20LR_MF0_2013.pdf?src-supplier=Avnet, Construction=Cylindrical, Contact Plating=Tin,Matte, Diameter=2.3mm, LatestRevisionDate=17-Jul-2002, LatestRevisionNote="Re-released for DXP Platform.", Length=6.3mm, Military Standard=Not, Mount="Through Hole", PackageDescription="Axial Device, Thru-Hole; 2 Leads; 0.4 in Pin Spacing", PackageReference=AXIAL-0.4, Packaging="Ammo Pack", Pricing 1="5000=0,01445 (USD)", Published=8-Jun-2000, Publisher="Altium Limited", Radiation Hardening=No, RoHS=Yes, RoHS Compliant=Yes, Supplier 1=Digi-Key, Termination=Axial
R4: library part CMP-2001-04524-1, Manufacturer=Yageo, Part Number=RC0805JR-131K5L
R5: library part Res2, "Resistor", Supplier Part Number 1=CA5100R2200JR05, LatestRevisionDate=17-Jul-2002, LatestRevisionNote="Re-released for DXP Platform.", PackageDescription="Axial Device, Thru-Hole; 2 Leads; 0.4 in Pin Spacing", PackageReference=AXIAL-0.4, Published=8-Jun-2000, Publisher="Altium Limited", Supplier 1="Arrow Electronics"
R7 R10: library part CMP-2001-03776-1, Manufacturer="Vishay Dale", Part Number=CRCW08052K70JNEA
R8: library part CMP-2001-04579-1, Manufacturer="KOA Speer", Part Number=RK73B2ATTD100J
SW1 SW2 SW3: library part CMP-1452-00015-1, "WS-TASV SMD Tact Switch 6X6 mm", Manufacturer="Wuerth Elektronik", ComponentLink1Description="Manufacturer URL", ComponentLink1URL=http://www.we-online.com, ComponentLink2Description=Datasheet, ComponentLink2URL=http://katalog.we-online.de/em/datasheet/4301x2.pdf, NoPins=04, PackageReference=430182070816, PartNumber=430182070816
Vin Vout: library part CMP-1502-03256-1, "Series 101 - 5.00 mm Horizontal Entry Modular with Pressure Clamp WR-TBL, 2 pin", Manufacturer="Wurth Elektronik", Operating Temperature=-40to105degC, Datasheet URL=http://katalog.we-online.de/em/datasheet/6911017100xx.pdf, Manufacturer URL=http://www.we-online.de, Mounting Technology=THT, Package Reference=691101710002, Packaging=Box, Part Number=691101710002, Pin Number=2, Pitch=5.00mm, Publisher=WurthElektronik
VR1 VR2: library part CMP-2000-05078-1, "Square Trimming Potentiometer, 10 KOhm, 500 mW, -55 to 125 degC, 3-Pin THD, RoHS, Tube", Manufacturer=Bourns, Manufacturer Part Number=3299W-1-103LF, Operating Temperature Range=-55Cto+125C, Package Description="3-Pin Surface Mount Device, Body 9.53 x 6.1 mm, Pitch 2.54 mm", Package Reference=3299W, Power Rating=500mW(1/2W), Resistance=10kOhms, Temperature Coefficient=100PPM/C, Tolerance=10%, Voltage Rating=300V, Adjustment=TopCrossed, Brand=Bourns, Datasheet URL=https://datasheet.ciiva.com/19482/769696-19482212.pdf, Datasheet Version=Sep-04, Element Type=Cermet, Length=10.03mm, Manufacturer URL=http://www.bourns.com/, Mounting=PanelMount, Packaging=Tube, Product=Multiturn, Product Category=TrimmerResistors-ThroughHole, Product Type=SquareTrimmingPotentiometer, Qualification=Commercial, RoHS=True, Series=3299, Taper=Linear, Termination Style=Pin, Tradename=Trimpot, Type=Trimmers, Unit Weight=0.035000oz, Width=9.53mm
Y1: library part 830051235, "WE-XTAL Quartz Crystal, SMT, HC49/4HSMX, 16MHz, +/-30ppm", Frequency Stability=+/-50ppm, Frequency Tolerance=+/-30ppm, Load Capacitance=18pF, Manufacturer="Wurth Elektronik", Operating Temperature="-40 to +85degC", ComponentLink1Description=Manufacturer, ComponentLink1URL=http://www.we-online.de, ComponentLink2Description=Datasheet, ComponentLink2URL=https://katalog.we-online.com/pbs/datasheet/830051235.pdf, Frequency=16MHz, Manufacturer Part Number=830051235, Mounting Technology=SMT, Packaging="Tape and Reel", Published Date="July 2020", Size=HC49/4HSMX

## Free pads (board coordinates)
  round 0.5 hole 0.3: 11(26.035,49.022) 13(49.53,33.782) q(26.035,64.262)
  round 6.35 hole 3.2: 14(20.32,95.377) 15(83.82,14.097) 16(10.16,14.097) 17(68.58,95.377)

## Via types
v1: diameter 2.54, hole 0.711, Top Layer to Bottom Layer, 4 vias
v2: diameter 0.508, hole 0.3, Top Layer to Bottom Layer, 1 vias
v3: diameter 0.4, hole 0.2, Top Layer to Bottom Layer, 1 vias

## Nets (pads, with @x,y where several pads share a name; then routed paths per layer and width w, separated by ;. In a path a pad name is that pad's centre, name@x,y a point inside that pad or via, vN(x,y) a via of type N, cw(c..) or ccw(c..) an arc to the next point about the centre after c; other vN are vias at no path point)
GND: C1.2 C2.2 C3.2 C4.2 C5.1 C6.2 C7.2 C9.2 C10.2 C11.2 H1.2 H2.1 H2.5 H2.15 H3.6 IC1.8 IC1.22 IC2.4 J3.2 J4.2 J5.1 LED1.1 LED2.1 Q1.2 R5.1 R6.1 R7.1 SW1.1 SW1.3 SW2.1 SW2.3 SW3.2 SW3.4 Vin.1 VR2.3 | length 521.5
  Top Layer w0.381: C3.2 16.278,50.292 17.145,49.425 v2(17.145,49.022) R6.1 ; v1(13.97,85.217) LED1.1 18.908,72.712 19.348,73.152 J4.2 ; C4.2 16.51,33.782 ; J3.2 20.32,23.622 C5.1 20.746,21.939 24.184,21.939 24.406,21.717 39.37,21.717 IC1.22 40.64,25.661 42.438,27.459 47.017,27.459 H3.6 ; IC2.4@16.51,40.977 IC2.4 ; IC2.4@17.145,41.612 IC2.4 ; IC2.4@20.08,38.257 IC2.4 ; C1.2 36.83,39.907 39.94,43.017 SW2.1 SW2.3 SW2.3@54.265,43.017 ; IC1.8 43.18,13.461 54.204,2.437 C9.2@55.045,2.437 ; C9.2@54.96,2.721 C9.2 ; R7.1@58.039,47.952 R7.1 58.039,45.502 C11.2@58.177,45.364 ; C11.2@58.221,45.408 C11.2@58.177,45.364 ; H1.2 59.69,42.955 59.752,43.017 ; C10.2 64.655,2.437 C9.2 ; LED2.1 69.215,25.112 J5.1 71.92,32.042 SW3.2 ; VR2.3 72.39,13.192 74.924,15.726 C6.2 74.924,16.278 73.66,17.542 73.66,22.987 74.765,24.092 SW3.4 SW3.2 ; SW1.3 SW1.1 59.752,43.017 ; SW3.2@76.49,32.167 SW3.2 ; C7.2 76.835,32.387 SW3.2 ; IC2.4 5.715,41.402 2.54,38.227 2.54,22.376 2.552,22.364 2.552,12.198 2.54,12.186 H2.1 4.445,0.762 10.795,0.762 H2.5 14.605,0.762 36.195,0.762 H2.15 40.005,0.762 53.37,0.762 C9.2@55.045,2.437 ; SW2.3@54.265,43.017 59.752,43.017 ; SW2.3@54.265,43.017 56.46,45.212 C11.2 C11.2@58.299,45.242 ; C9.2@55.045,2.437 C9.2 ; C11.2@58.177,45.364 58.055,45.242 C11.2@58.299,45.242 ; C11.2@58.177,45.364 C11.2@58.299,45.242
  Top Layer w0.508: J3.2 16.51,33.782 IC2.4@16.51,40.977 ; IC2.4@17.145,41.612 v2(17.145,49.022) ; IC2.4@20.08,38.257 C1.2
  Top Layer w2.54: Vin.1 13.97,90.122 v1(13.97,85.217) v1(21.59,85.217) ; v1(33.02,90.932) Q1.2@33.02,96.647
  Bottom Layer w0.381: H1.2 J5.1 ; C2.2 C2.2@69.275,65.592 ; R5.1@82.236,65.973 R5.1
  Bottom Layer w0.508: v2(17.145,49.022) 17.145,80.772 v1(21.59,85.217)
  Bottom Layer w2.54: Vin.1 13.97,90.122 v1(13.97,85.217) v1(21.59,85.217) ; v1(33.02,90.932) Q1.2@33.02,96.647
  Bottom Layer w3.81: 30.48,85.217 36.989,85.217 38.259,83.947 48.736,83.947 50.006,85.217 56.515,85.217 62.865,78.867 62.865,72.002 C2.2 ; C2.2@69.275,65.592 R5.1@81.855,65.592
  Bottom Layer w7.62: v1(21.59,85.217) 30.48,85.217 33.02,87.757 v1(33.02,90.932)
NetC1_1: C1.1 C3.1 F1.2 IC2.1 L1.2 R1.2 | length 74.1
  Top Layer w0.381: 6.985,51.562 8.255,50.292 C3.1 ; F1.2 F1.2@6.985,58.457 ; 13.97,58.172 R1.2 ; L1.2@43.685,58.172 L1.2
  Top Layer w0.508: IC2.1 6.985,51.562 F1.2 ; C1.1 36.83,58.172
  Top Layer w7.62: F1.2 13.97,58.172 36.83,58.172 L1.2@43.685,58.172 ; L1.2@43.815,58.052 L1.2
NetC2_1: C2.1 D1.1 Vout.2 VR1.1 VR1.2 | length 76.8
  Top Layer w0.381: C2.1 71.245,73.152 74.93,69.467 VR1.1 VR1.2
  Bottom Layer w3.81: D1.1 50.8,94.434 53.032,92.202 58.42,92.202 69.215,81.407 ; C2.1 69.215,81.407 ; Vout.2@77.256,93.591 77.256,89.448 69.215,81.407
NetC4_1: C4.1 C6.1 H2.2 H3.2 IC1.7 IC1.20 IC2.3 J3.1 R2.2 R9.2 VR2.1 | length 162.1
  Top Layer w0.381: H2.2 5.08,28.702 6.985,30.607 ; 6.985,36.322 9.525,33.782 C4.1 ; J3.1 13.97,21.717 17.78,17.907 38.1,17.907 IC1.7 ; R2.2 IC1.7 ; IC1.20 45.72,20.447 IC1.7 ; VR2.1 77.47,15.996 C6.1 77.476,16.278 78.74,17.542 R9.2 ; 77.47,8.509 77.476,8.515
  Top Layer w0.508: IC2.3 6.985,36.322 6.985,30.607 10.16,27.432 J3.1
  Bottom Layer w0.381: IC1.7 42.545,13.462 71.755,13.462 VR2.1 ; H3.2 44.45,27.432 44.45,24.257 IC1.20
NetC5_2: C5.2 IC1.21 | length 24.2
  Top Layer w0.381: C5.2 40.005,19.812 IC1.21
NetC7_1: C7.1 IC1.24 R4.2 | length 51.3
  Top Layer w0.381: IC1.24 35.56,26.797 43.815,35.052 74.93,35.052 75.656,35.778 C7.1 R4.2
NetC9_1: C9.1 IC1.9 Y1.1 | length 17.2
  Top Layer w0.381: IC1.9 45.72,15.217 Y1.1@53.19,7.747 ; Y1.1@53.19,8.89 54.94,8.89 Y1.1@55.245,8.585 ; C9.1 Y1.1@55.245,8.204
NetC10_1: C10.1 IC1.10 Y1.2 | length 23.9
  Top Layer w0.381: IC1.10 52.705,10.922 59.515,10.922 Y1.2@62.69,7.747 ; Y1.2@62.69,8.89 64.44,8.89 Y1.2@64.77,8.56 ; C10.1 Y1.2@64.77,8.179
NetC11_1: C11.1 IC1.23 R3.2 R7.2 | length 55.5
  Top Layer w0.381: R3.2 56.515,50.292 58.329,50.292 59.889,48.732 R7.2 C11.1@59.889,45.32 ; C11.1 C11.1@59.889,45.32 ; C11.1@60.071,45.502 C11.1@59.889,45.32
  Bottom Layer w0.381: IC1.23 38.1,26.491 43.359,31.75 50.384,31.75 55.883,37.248 57.225,37.248 57.645,37.667 58.42,38.443 58.42,42.037 54.61,45.847 R3.2 54.927,51.88 R3.2@55.245,52.197
NetD1_3: D1.3 L1.1 Q1.3 | length 53.1
  Top Layer w2.54: Q1.3@36.195,96.647 v1(43.815,89.027)
  Top Layer w3.81: v1(43.815,89.027) 52.705,89.027 55.88,92.202 D1.3
  Top Layer w7.62: L1.1 v1(43.815,89.027)
  Bottom Layer w2.54: Q1.3@36.195,96.647 v1(43.815,89.027)
NetF1_1: F1.1 Vin.2 | length 13.6
  Top Layer w0.381: Vin.2@5.438,93.02 Vin.2 ; F1.1 F1.1@7.053,80.84
  Top Layer w2.54: Vin.2 5.755,82.002 F1.1
NetH1_1: H1.1 IC1.26 SW1.2 SW1.4 | length 51.3
  Top Layer w0.381: IC1.26 30.48,26.162 40.005,35.687 59.055,35.687 H1.1 64.895,38.862 SW1.2 SW1.4
NetH1_3: H1.3 IC1.25 SW2.2 SW2.4 | length 41.8
  Top Layer w0.381: SW2.2 SW2.4 54.485,38.862 H1.3
  Bottom Layer w0.381: IC1.25 42.926,32.893 50.257,32.893 55.845,38.481 56.466,38.481 56.847,38.862 H1.3
NetH2_3: H2.3 VR2.2 | length 71
  Bottom Layer w0.381: H2.3 9.525,0.762 67.945,0.762 VR2.2
NetH2_4: H2.4 IC1.6 | length 36.5
  Top Layer w0.381: H2.4 12.7,5.207 33.655,5.207 38.1,9.652 IC1.6
NetH2_6: H2.6 IC1.11 | length 43.4
  Bottom Layer w0.381: H2.6 26.67,14.097 26.67,15.786 27.445,16.562 28.156,17.272 48.895,17.272 IC1.11
NetH2_11: H2.11 IC1.2 | length 12.7
  Bottom Layer w0.381: H2.11 IC1.2
NetH2_12: H2.12 IC1.3 | length 12.7
  Bottom Layer w0.381: H2.12 IC1.3
NetH2_13: H2.13 IC1.4 | length 12.7
  Bottom Layer w0.381: H2.13 IC1.4
NetH2_14: H2.14 IC1.5 | length 12.7
  Bottom Layer w0.381: H2.14 IC1.5
NetH2_16: H2.16 J2.1 | length 4.4
  Bottom Layer w0.381: H2.16 J2.1@45.085,2.667
NetH3_1: H3.1 IC1.18 | length 8.9
  Top Layer w0.381: H3.1 45.085,24.257 49.53,24.257 IC1.18
NetH3_3: H3.3 IC1.19 | length 4.2
  Bottom Layer w0.381: H3.3 48.022,23.86 48.022,23.225 IC1.19
NetH3_4: H3.4 IC1.17 | length 12.4
  Top Layer w0.381: H3.4 45.91,28.892 46.761,28.892 47.765,29.896 48.755,29.896 53.34,25.311 IC1.17@53.34,23.154 ; IC1.17@53.173,23.154 IC1.17
NetH3_5: H3.5 IC1.1 R9.1 SW3.1 SW3.3 | length 80.7
  Top Layer w0.381: v3(76.2,21.717) 78.37,21.717 R9.1 78.915,21.347 79.288,21.72 79.288,22.265 80.99,23.967 SW3.3 SW3.1
  Bottom Layer w0.381: IC1.1 25.4,17.272 26.67,18.542 35.344,18.542 39.37,22.568 39.37,26.491 41.985,29.107 41.985,29.197 42.685,29.896 42.775,29.896 43.486,30.607 45.72,30.607 46.99,29.337 46.99,27.432 H3.5 52.607,26.162 54.535,24.235 54.535,22.643 55.461,21.717 v3(76.2,21.717)
NetIC1_15: IC1.15 J1.2 | length 3.2
  Bottom Layer w0.381: IC1.15 J1.2
NetIC1_16: IC1.16 R10.2 | length 6.6
  Top Layer w0.381: IC1.16 57.785,24.892 R10.2
NetJ1_1: J1.1 R8.2 | length 2.8
  Top Layer w0.381: R8.2@58.42,30.977 J1.1 J1.1@58.79,29.072
NetJ2_2: J2.2 R2.1 | length 5.1
  Top Layer w0.381: R2.1 40.715,7.117 42.625,5.207 J2.2
NetJ4_1: J4.1 LED1.2 R1.1 | length 8.6
  Top Layer w0.381: R1.1 LED1.2 J4.1
NetJ5_2: J5.2 LED2.2 R10.1 | length 7.9
  Top Layer w0.381: R10.1 LED2.2 66.675,25.112 J5.2
NetQ1_1: pad.11 pad.13 pad.q Q1.1 R6.2 R8.1 | length 91.9
  Top Layer w0.381: R6.2 pad.11 ; pad.q 26.035,92.202 Q1.1@30.48,96.647 ; pad.13 57.24,33.782 58.245,32.777 R8.1@58.42,32.777
  Bottom Layer w0.381: pad.q pad.11 33.337,49.022 pad.13
NetR3_1: R3.1 VR1.3 | length 5.1
  Top Layer w0.381: R3.1 VR1.3
NetR4_1: R4.1 R5.2 Vout.1 | length 55.6
  Top Layer w0.381: R4.1 77.06,39.827 77.333,40.1 77.333,78.73 R5.2@81.915,83.312 ; Vout.1@82.296,93.265 Vout.1 Vout.1@82.351,93.48
  Top Layer w3.81: R5.2 Vout.1@82.296,93.265
pads on no net: H2.7 H2.8 H2.9 H2.10 IC1.12 IC1.13 IC1.14 IC1.27 IC1.28

## Polygon pours and split planes (outlines as drawn)
no net on Top Layer "NONET_L01_P003" (solid, pour order 3): 0.889,98.806 0.889,52.832 1.016,52.705 53.34,52.705 57.658,57.023 57.658,65.913 39.116,65.913 38.354,66.675 38.354,87.757 33.274,87.757 22.098,98.933 21.971,98.806
no net on Top Layer "NONET_L01_P004" (solid, pour order 4): 39.624,67.183 39.624,98.933 59.944,98.933 60.198,98.679 60.198,67.183
no net on Top Layer "NONET_L01_P005" (solid, pour order 5): 58.928,57.023 58.928,65.913 60.198,65.913 61.468,67.183 61.468,98.933 89.281,98.933 89.281,57.023
GND on Bottom Layer "GND_L02_P002" (solid, remove dead copper, pour order 2): 0.508,99.06 0.508,0.508 89.281,0.381 89.281,99.06

## Silkscreen, mask and mechanical layers (free items; w line width, h text height)
Top Overlay:
  text "+" at 5.334,97.79 h1.52
  text "-" at 10.16,97.663 h1.52
  text "+" at 76.708,97.663 h1.52
  text "-" at 81.788,97.663 h1.52
  text "-" at 19.304,74.549 h1.52
  text "+" at 19.304,68.072 h1.52
  text "+" at 64.262,27.051 h1.52
  text "-" at 70.104,26.924 h1.52
  text "5V" at 9.779,26.416 h1.52
  text "GND" at 18.034,26.416 h1.52
  text "100 Watt Boost Converter" at 86.741,19.939 h1.52 r90
  text "Designed by / Bram Vanderwegen" at 15.494,6.351 h3
Boardoutline:
  lines w0.381: 0.127,0.127 89.789,0.127 89.789,99.695 0.356,99.695 0.127,99.466 0.127,0.127

## Text inside footprints (layer, text, board x,y; h text height)
C1: Top Overlay "+" at 40.005,51.562 h1.22 r90
C2: Top Overlay "+" at 69.85,78.867 h1.5 r90
H3: Top Overlay "5" at 49.784,25.654 h1.27; Top Overlay "6" at 49.784,28.194 h1.27; Top Overlay "2" at 40.64,28.194 h1.27; Top Overlay "1" at 41.148,25.654 h1.27